# Altium PCB PCB1.PcbDoc
Units mm, origin at the board's own origin, x right, y up, seen from the top; angles counter-clockwise.
Board outline 46.58 x 46.58 mm, 2 copper layers (Top Layer, Bottom Layer); 45 components, 58 nets, 168 pads, 34 vias.
Unrouted connection lines stored in the file: 11.
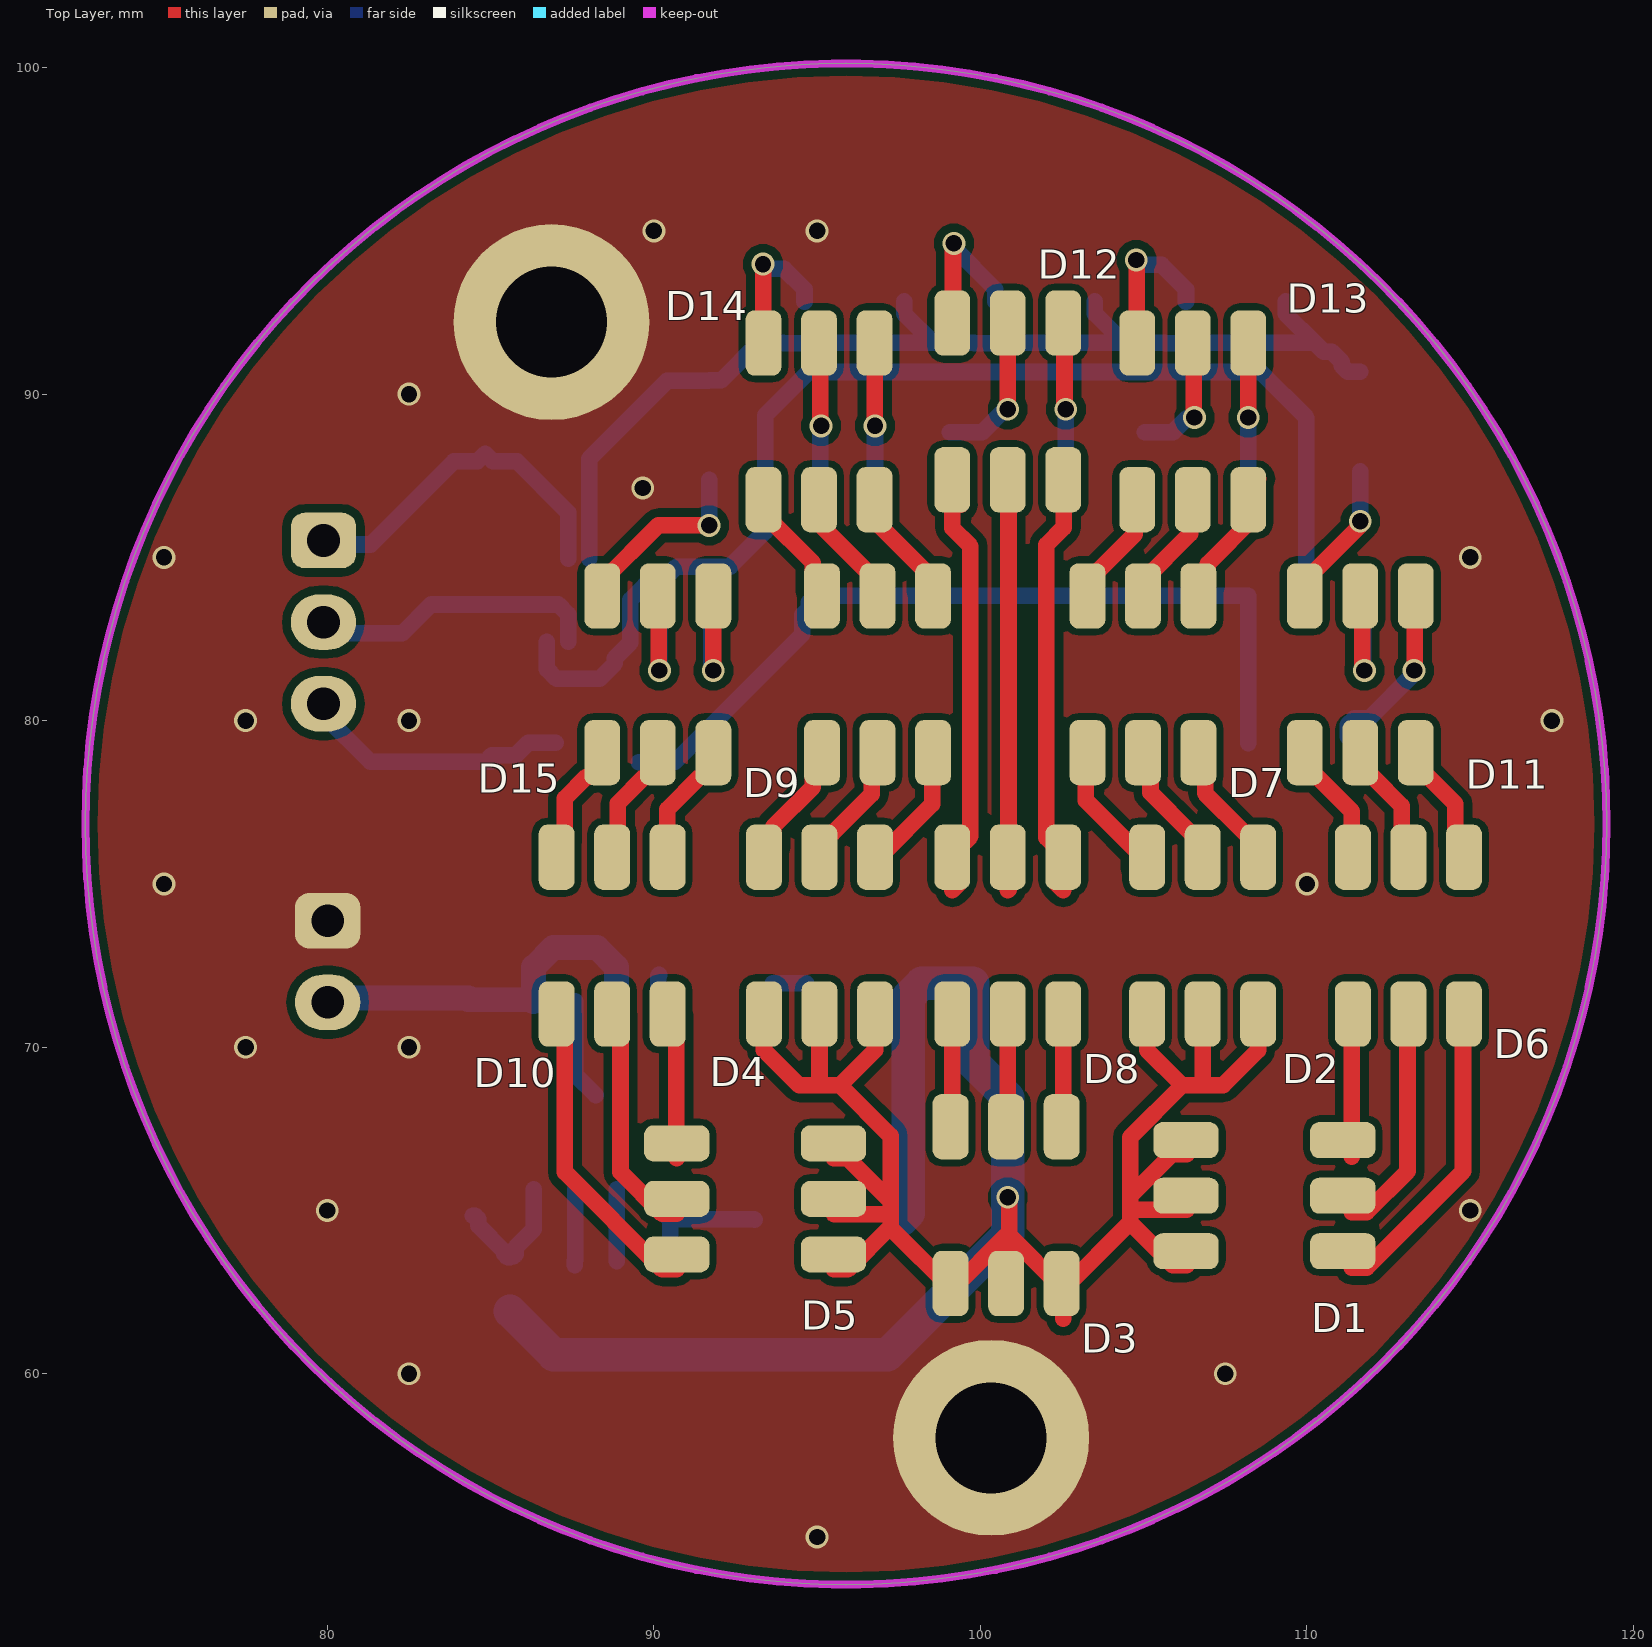
[diagram p0: Top Layer view]
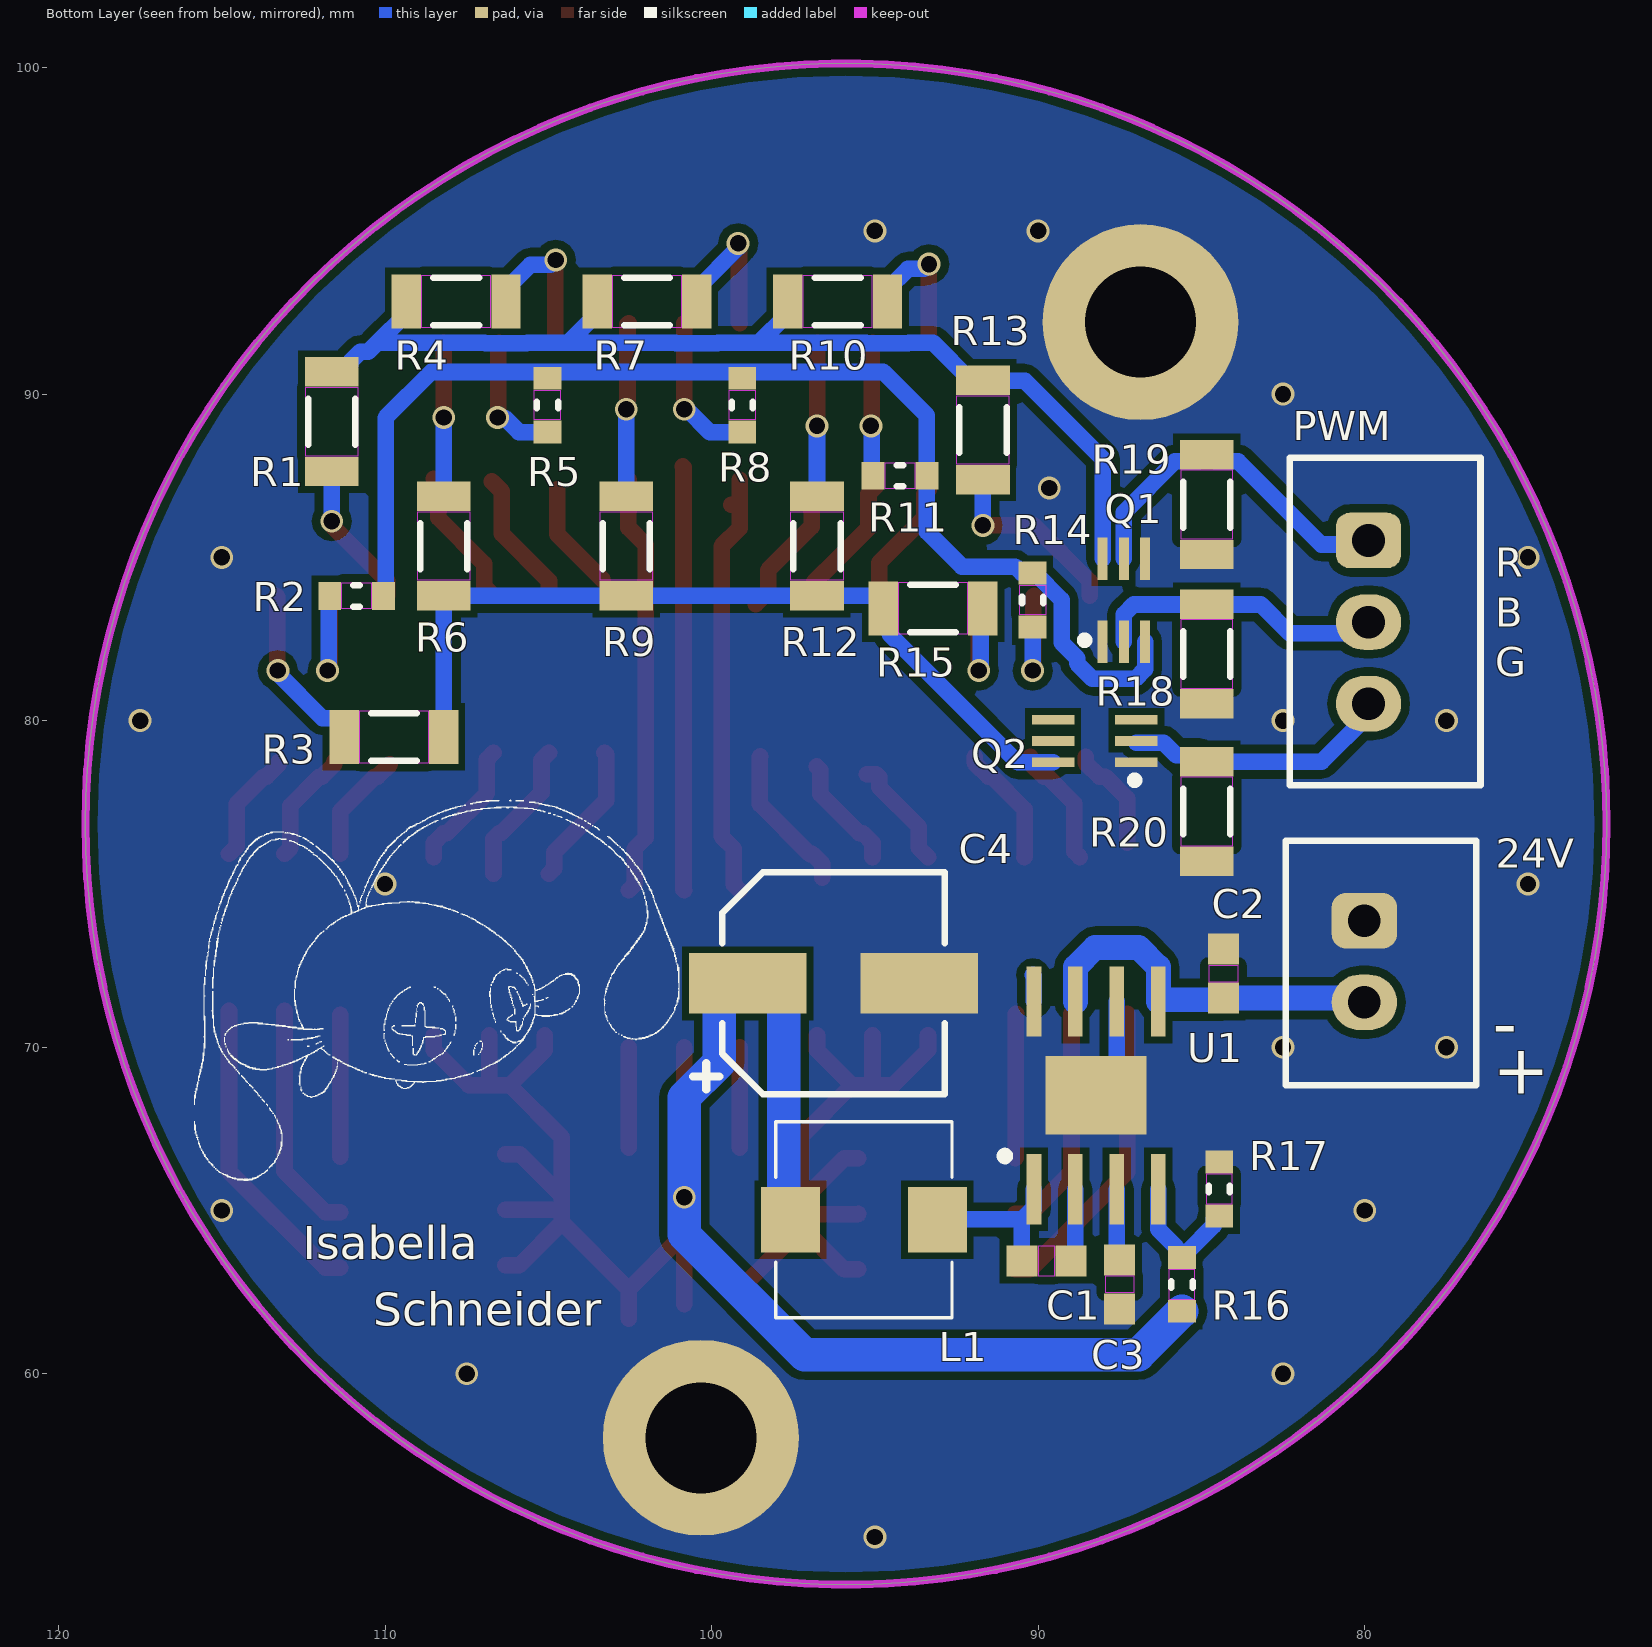
[diagram p1: Bottom Layer view, seen from below]
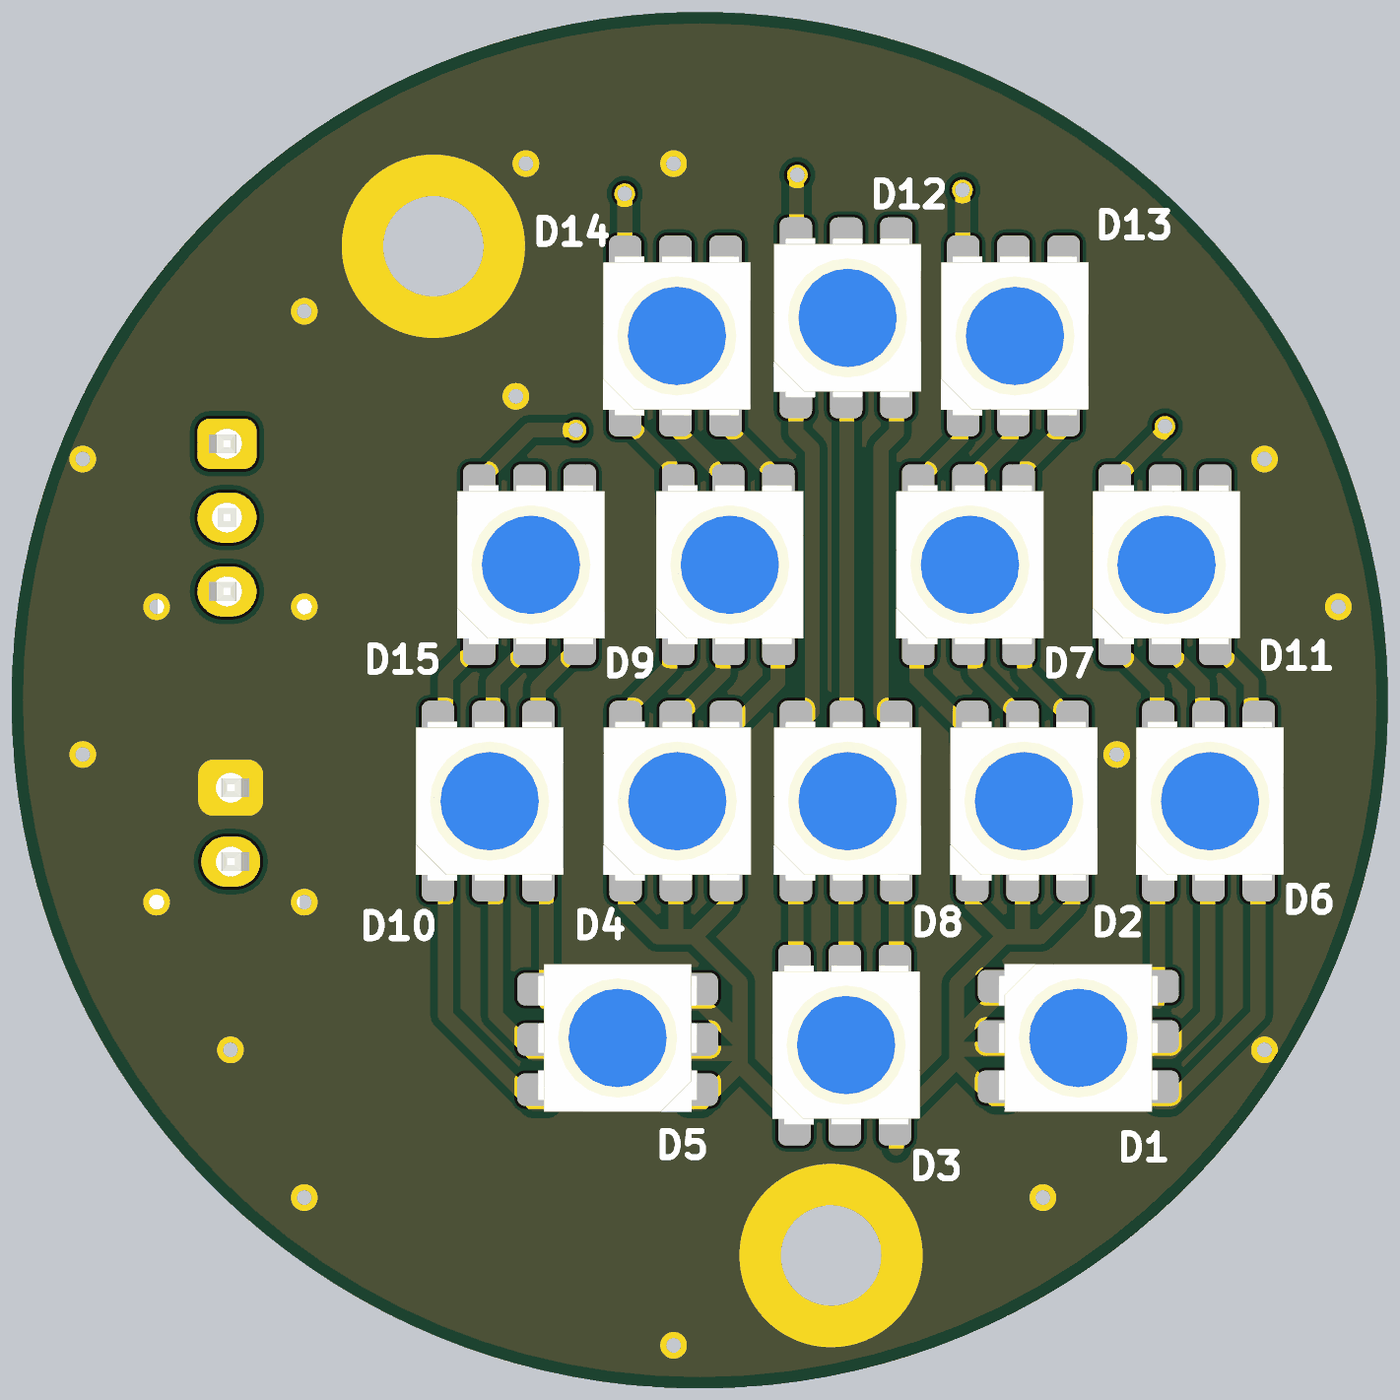
[diagram p2: 3D render of the assembled board from above, using the file's embedded part models]
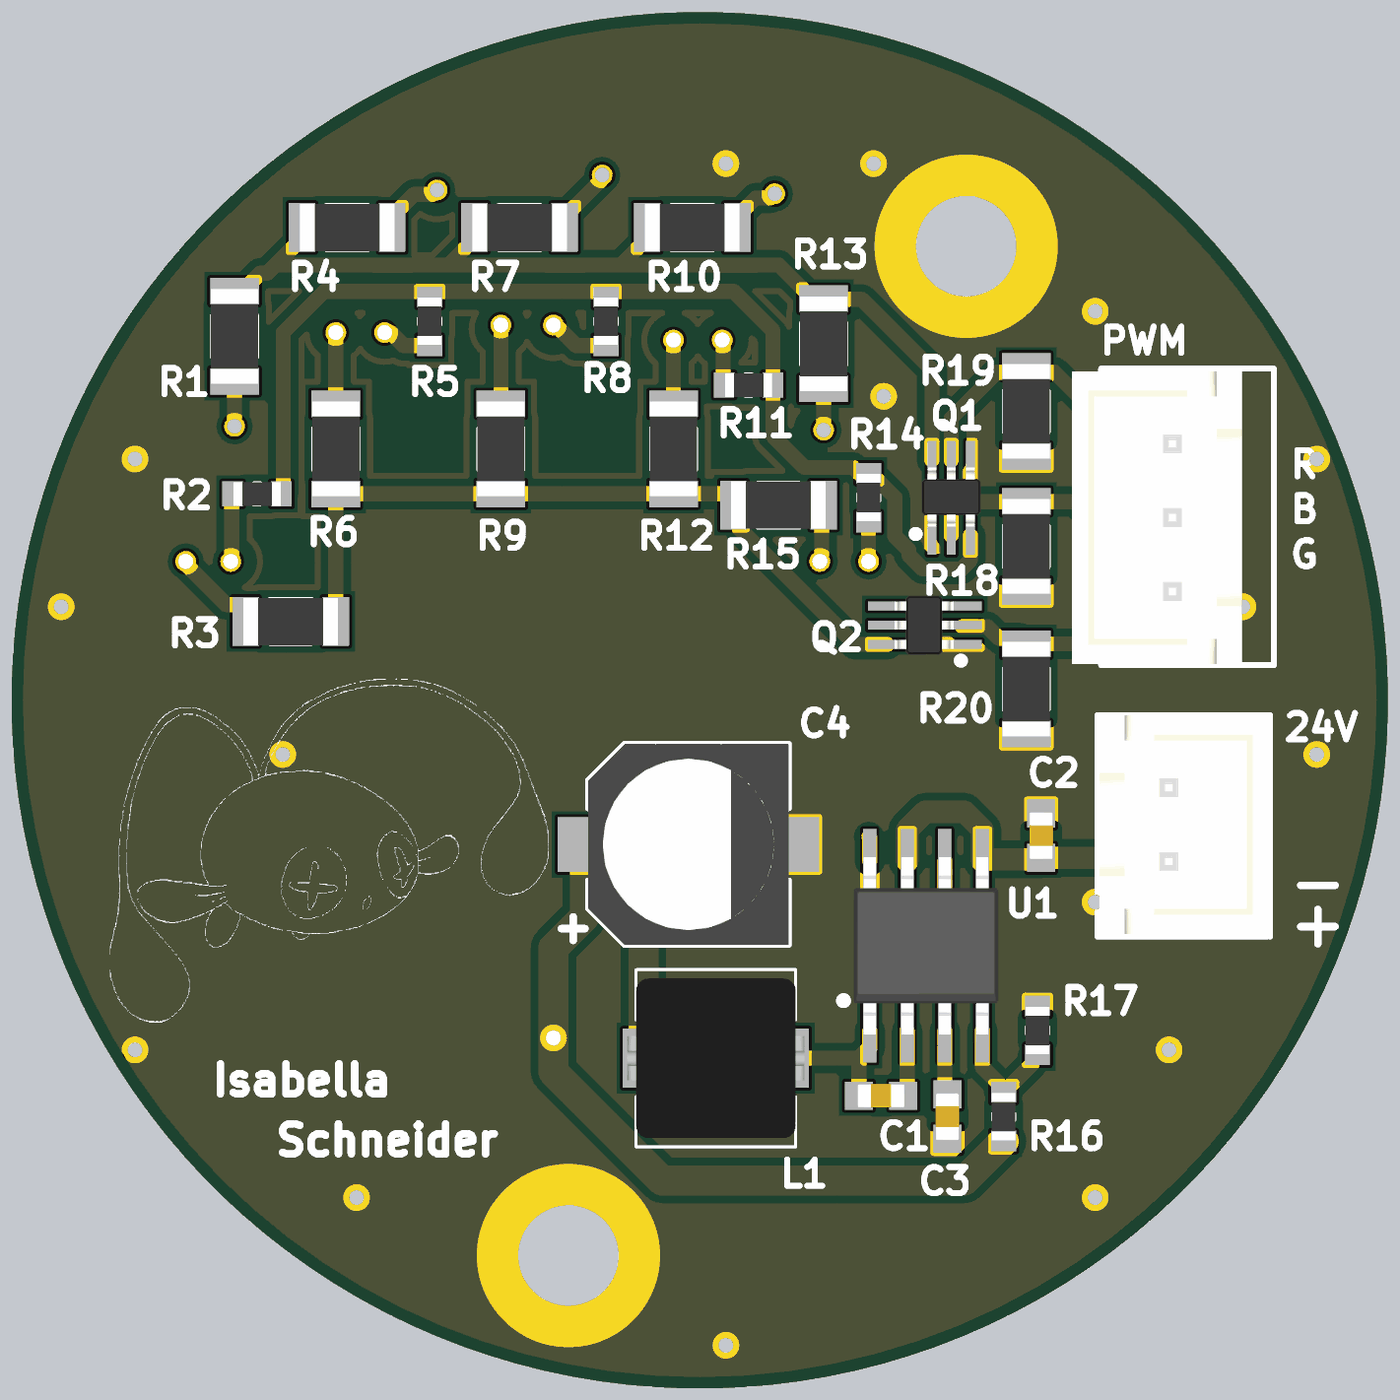
[diagram p3: 3D render of the assembled board from below, using the file's embedded part models]

## Layer stack, top to bottom
Top Solder: solder mask 0.0102, Solder Resist, Dk 3.5
Top Layer: signal copper 0.0356
Dielectric 1: dielectric 0.32, FR-4, Dk 4.8
Bottom Layer: signal copper 0.0356
Bottom Solder: solder mask 0.0102, Solder Resist, Dk 3.5

## Board outline
72.593,76.835 ccw(c95.885,76.835) 95.885,53.543 ccw(c95.885,76.835) 119.177,76.835 ccw(c95.885,76.835) 95.885,100.127 ccw(c95.885,76.835)

## Design rules (kind name [scope] priority, off if disabled: settings)
Clearance [All] p1: gap=0.254 ignorepadtopadclearanceinfootprint=FALSE except(0: Arc-Hole Track-Hole SMDPad-Hole THPad-Hole Via-Hole Fill-Hole Poly-Hole Region-Hole Text-Hole; 0.127: Arc-Arc Arc-Track Track-Track SMDPad-SMDPad; 0.2: Arc-SMDPad Track-SMDPad SMDPad-Fill SMDPad-Poly SMDPad-Region)
MinimumSolderMaskSliver [All] p1: minsoldermaskwidth=0.229
PolygonConnect PolygonConnect_3 [All vs IsNamedPolygon('GND_L02_P005')] p1: connectstyle=Direct reliefconductorwidth=0.254 reliefentries=4 polygonreliefangle="90 Angle" airgapwidth=0.254
PolygonConnect PolygonConnect_2 [All vs IsNamedPolygon('GND_L01_P007')] p2: connectstyle=Direct reliefconductorwidth=0.254 reliefentries=4 polygonreliefangle="90 Angle" airgapwidth=0.254
PolygonConnect PolygonConnect_1 [All vs IsNamedPolygon('GND_L01_P007')] p3: thpad.connectstyle=Relief thpad.reliefconductorwidth=0.254 thpad.reliefentries=4 thpad.polygonreliefangle="90 Angle" thpad.airgapwidth=0.254 smdpad.connectstyle=Direct smdpad.reliefconductorwidth=0.254 smdpad.reliefentries=4 smdpad.polygonreliefangle="90 Angle" smdpad.airgapwidth=0.254 via.connectstyle=Relief via.reliefconductorwidth=0.254 via.reliefentries=4 via.polygonreliefangle="90 Angle" via.airgapwidth=0.254
PolygonConnect [All] p4: connectstyle=Relief reliefconductorwidth=0.254 reliefentries=4 polygonreliefangle="90 Angle" airgapwidth=0.254
RoutingVias [All] p1: holewidth=0.5 width=1 viastyle="Through Hole" minholewidth=0.2 minwidth=0.6 maxholewidth=0.711 maxwidth=1.27
SilkToSolderMaskClearance [IsPad] p1: minsilkscreentomaskgap=0.15 clearancetoexposedcopper=TRUE
SolderMaskExpansion [All] p1: expansion=0.102 istentingtop=FALSE
Width [All] p1: maxlimit=1.016 minlimit=0.254 preferedwidth=0.381 toplayer_prefwidth=0.254 minimp=50.000000 maximp=50.000000 favimp=50.000000
28 further rules are at their usual default settings.

## Components (designator, comment, footprint, x,y, rotation, side; value= is the part's Value field where it differs from the comment)
24V "1x2 Header" B2B-XH 80.01,71.374 r90 bottom (schematic designator P1)
C1 "Capacitor - Nonpolarized" "0603 - Capacitor" 89.749,63.446 r180 bottom value=100nF
C2 "Capacitor - Nonpolarized" "0603 - Capacitor" 84.328,72.251 r270 bottom value=10uF
C3 "Capacitor - Nonpolarized" "0603 - Capacitor" 87.503,62.738 r90 bottom value=2.2uF
C4 "Capacitor - Polarized" "OCVZ0606 - CAPACITOR" 96.268,71.955 r180 bottom value=27uF
D1 "RGB LED- Indiv" RGB-6 106.299,63.754 r0 top
D2 "RGB LED- Indiv" RGB-6 108.507,71.019 r90 top
D3 "RGB LED- Indiv" RGB-6 102.489,62.764 r90 top
D4 "RGB LED- Indiv" RGB-6 96.774,71.019 r90 top
D5 "RGB LED- Indiv" RGB-6 95.504,67.054 r180 top
D6 "RGB LED- Indiv" RGB-6 114.808,71.019 r90 top
D7 "RGB LED- Indiv" RGB-6 106.68,79.02 r90 top
D8 "RGB LED- Indiv" RGB-6 102.538,71.019 r90 top
D9 "RGB LED- Indiv" RGB-6 98.552,79.02 r90 top
D10 "RGB LED- Indiv" RGB-6 90.424,71.019 r90 top
D11 "RGB LED- Indiv" RGB-6 113.333,79.02 r90 top
D12 "RGB LED- Indiv" RGB-6 108.204,86.767 r90 top
D13 "RGB LED- Indiv" RGB-6 102.538,87.376 r90 top
D14 "RGB LED- Indiv" RGB-6 96.76,86.767 r90 top
D15 "RGB LED- Indiv" RGB-6 91.821,79.02 r90 top
L1 "Inductor" "PA4340 - Inductor" 95.337,64.716 r0 bottom value=4.7uH
PWM "1x3 Header" B3B-XH 79.883,85.518 r270 bottom (schematic designator P2)
Q1 "BSD235NH6327XTSA1" BSD235NH6327XTSA1 88.026,84.963 r180 bottom
Q2 "BSD235NH6327XTSA1" BSD235NH6327XTSA1 89.545,78.725 r90 bottom
R1 "Resistor" "1206 - Resistor" 111.633,89.154 r270 bottom value=160
R2 "Resistor" "0603 - Resistor" 110.871,83.82 r0 bottom value=60
R3 "Resistor" "1206 - Resistor" 109.728,79.502 r0 bottom value=160
R4 "Resistor" "1206 - Resistor" 107.823,92.837 r180 bottom value=160
R5 "Resistor" "0603 - Resistor" 105.029,89.662 r270 bottom value=60
R6 "Resistor" "1206 - Resistor" 108.204,85.344 r90 bottom value=160
R7 "Resistor" "1206 - Resistor" 101.981,92.837 r180 bottom value=160
R8 "Resistor" "0603 - Resistor" 99.06,89.662 r270 bottom value=60
R9 "Resistor" "1206 - Resistor" 102.616,85.344 r90 bottom value=160
R10 "Resistor" "1206 - Resistor" 96.139,92.837 r180 bottom value=160
R11 "Resistor" "0603 - Resistor" 94.234,87.503 r0 bottom value=60
R12 "Resistor" "1206 - Resistor" 96.774,85.344 r90 bottom value=160
R13 "Resistor" "1206 - Resistor" 91.694,88.9 r270 bottom value=160
R14 "Resistor" "0603 - Resistor" 90.17,83.693 r270 bottom value=60
R15 "Resistor" "1206 - Resistor" 93.218,83.439 r180 bottom value=160
R16 "Resistor" "0603 - Resistor" 85.598,62.738 r270 bottom value=243K
R17 "Resistor" "0603 - Resistor" 84.455,65.659 r270 bottom value=22.1K
R18 "Resistor" "1206 - Resistor" 84.836,82.042 r90 bottom value=1k
R19 "Resistor" "1206 - Resistor" 84.836,86.614 r90 bottom value=1k
R20 "Resistor" "1206 - Resistor" 84.836,77.216 r90 bottom value=1k
U1 "LMR23625CDDAR" LMR23625CDDAR 90.13,65.651 r180 bottom

## Footprints (in the part's own frame and the unit in brackets; to place one, negate y for a bottom-side part, rotate by r counter-clockwise, add the part's x,y. Pads: shape width x height; smd on the part's side, far side on the other; paste and mask are expansions set on the pad)
"0603 - Capacitor" [mm] "0603 Chip Capacitor - IPC Medium Density"
  rect 0.95x0.95 smd: 1(-0.75,0) 2(0.75,0)
  Top Layer keep-out region: -0.25,0.45 -0.25,-0.45 0.25,-0.45 0.25,0.45
  body extent -0.8,-0.4 0.8,0.4, height 0.8
"0603 - Resistor" [mm] "0603 Chip Resistor - IPC Medium Density"
  rect 0.7x0.85 smd: 1(-0.825,0) 2(0.825,0)
  Top Layer keep-out region: -0.45,-0.4 -0.45,0.4 0.45,0.4 0.45,-0.4
  silkscreen extent -0.1,-0.33 0.1,0.33, body extent -0.8,-0.4 0.8,0.4, height 0.45
"1206 - Resistor" [mm] "1206 Chip Resistor - IPC Medium Density"
  rect 0.9x1.65 smd: 1(-1.525,0) 2(1.525,0)
  Top Layer keep-out region: -1.05,-0.8 -1.05,0.8 1.05,0.8 1.05,-0.8
  silkscreen extent -0.7,-0.72 0.7,0.72, body extent -1.6,-0.8 1.6,0.8, height 0.55
B2B-XH [mm] "JST 2-pin Header"
  oval 1.7x2 hole 1: 1(0,0)
  rrect50% 1.7x2 hole 1: 2(2.5,0)
  silkscreen extent -2.54,-3.43 4.95,2.41, body extent -2.45,-3.4 4.95,2.35, height 7
B3B-XH [mm] "JST 3-pin connector"
  rrect50% 1.7x2 hole 1: 1(0,0)
  oval 1.7x2 hole 1: 2(2.5,0) 3(5,0)
  silkscreen extent -2.54,-2.41 7.49,3.43, body extent -2.45,-3.4 7.45,2.35, height 7
BSD235NH6327XTSA1 [mm] "SOT-363"
  rect 0.3x1.3 smd: 1(0,-2.55) 2(0.65,-2.55) 3(1.3,-2.55) 4(1.3,0) 5(0.65,0) 6(0,0)
  silkscreen extent -0.66,-2.61 -0.44,-2.39, body extent -0.35,-2.25 1.65,-0.25, height 1.05
LMR23625CDDAR [mm] "8-SO POWERPAD"
  rect 0.45x2.15 smd: 1(0,0) 2(1.27,0) 3(2.54,0) 4(3.81,0) 5(3.81,5.75) 6(2.54,5.75) 7(1.27,5.75) 8(0,5.75)
  rect 3.1x2.4 smd: 9(1.905,2.875)
  silkscreen extent -1.02,0.89 -0.76,1.14, body extent -0.54,-0.12 4.36,5.88, height 1.57
"OCVZ0606 - CAPACITOR" [mm] "Aluminum Electrolytic Capacitor, Body 6.60x6.60x6.00mm, IPC Low Density"
  rect 3.6x1.85 smd: 1(-2.625,0) 2(2.625,0)
  silkscreen extent -4.3,-3.4 3.4,3.4, body extent -3.6,-3.4 3.6,3.4, height 6
"PA4340 - Inductor" [mm]
  rect 1.8x2 smd: 1(-2.25,0) 2(2.25,0)
  silkscreen extent -2.7,-3 2.7,3, body extent -3,-2.7 3,2.7, height 2.7
RGB-6 [mm] "6 Pin RGB"
  rrect50% 2x1.1 smd: 1(0,0) 2(0,1.7) 3(0,3.4) 4(4.8,3.4) 5(4.8,1.7) 6(4.8,0)
  body extent -0.3,-0.85 5.1,4.15, height 1.85

## Part data
24V: "1x2 Pin Header"
C1 C2 C3: "Nonpolarized Capacitor"
C4: "Polarized Capacitor"
D1 D2 D3 D4 D5 D6 D7 D8 D9 D10 D11 D12 D13 D14 D15: "6-pin RGB LED"
PWM: "1x3 Pin Header"
U1: "36V 2.5A Buck Converter", Manufacturer=TI, Supplier Part Number=296-47268-1-ND, ComponentLink1Description=Datasheet, ComponentLink1URL=https://www.ti.com/lit/ds/symlink/lmr23625.pdf?HQS=dis-dk-null-digikeymode-dsf-pf-null-wwe&ts=1623367278580, Manufacturer Part Number=LMR23625CDDAR, Supplier=Digikey

## Free pads (board coordinates)
  round 6 hole 3.4: 2(86.868,92.202) 3(100.33,58.039)

## Via types
v1: diameter 0.7, hole 0.5, Top Layer to Bottom Layer, 34 vias

## Nets (pads, with @x,y where several pads share a name; then routed paths per layer and width w, separated by ;. In a path a pad name is that pad's centre, name@x,y a point inside that pad or via, vN(x,y) a via of type N, cw(c..) or ccw(c..) an arc to the next point about the centre after c; other vN are vias at no path point)
+12: C4.1 D1.1 D1.2 D1.3 D2.1 D2.2 D2.3 D3.1 D3.2 D3.3 D4.1 D4.2 D4.3 D5.1 D5.2 D5.3 L1.2 R16.2 | length 84.9
  Top Layer w0.508: D4.3@93.374,70.358 93.374,69.908 94.448,68.834 95.074,68.834 ; D4.2@95.074,70.358 95.074,68.834 ; D5.3@95.504,63.197 95.943,63.197 97.231,64.486 ; D5.2@95.504,64.897 95.523,64.878 97.25,64.878 ; D5.1@95.504,66.597 95.943,66.597 97.25,65.289 ; D4.1@96.774,70.358 96.774,69.908 95.7,68.834 ; 100.789,64.23 99.138,62.579 97.25,64.467 97.25,64.878 ; D3.2@100.838,62.129 100.838,64.23 ; v1(100.838,65.405) 100.887,65.356 100.887,64.23 D3.1@102.538,62.579 ; 102.538,61.679 102.538,62.129 D3.1@102.538,62.579 ; D2.3@105.107,70.358 105.107,69.908 106.181,68.834 ; D1.1@106.325,63.324 105.886,63.324 104.585,64.626 ; D1.2@106.325,65.024 104.585,65.024 ; D1.3@106.325,66.724 105.875,66.724 104.585,65.434 ; D2.2@106.807,70.358 106.807,68.834 ; D2.1@108.507,70.358 108.507,69.908 107.433,68.834 106.807,68.834 ; 95.074,68.834 95.7,68.834 ; 95.7,68.834 97.25,67.284 97.25,65.289 ; 97.25,64.878 97.25,65.289 ; D3.1@102.538,62.579 104.585,64.626 ; 104.585,64.626 104.585,65.024 ; 104.585,65.024 104.585,65.434 ; 104.585,65.434 104.585,67.238 106.181,68.834 ; 106.181,68.834 106.807,68.834
  Bottom Layer w1.016: R16.2 86.932,60.579 97.155,60.579 100.838,64.262 v1(100.838,65.405) ; L1.2 97.79,64.919 97.79,71.538 98.207,71.955 99.768,71.955 99.768,69.532 100.838,68.462 v1@100.838,65.361
BLUE: PWM.2 Q1.2 R18.2 | length 8.8
  Bottom Layer w0.508: PWM.2@79.883,82.677 82.301,82.677 83.18,83.556 84.836,83.556 87.078,83.556 87.376,83.258 Q1.2
GND: 24V.2 C2.1 C3.1 C4.2 pad.2 pad.3 Q1.1 Q1.4 Q2.1 R17.1 R18.1 R19.1 R20.1 U1.6 U1.8 U1.9 | length 5
  Bottom Layer w0.508: U1.6 87.59,69.161 U1.9 ; U1.8 90.13,72.18 U1.8@90.159,72.209 ; C4.2 C4.2@94.659,71.955
  other v1: 95,55 82.5,60 107.5,60 80,65 115,65 77.5,70 82.5,70 75,75 110,75 77.5,80 82.5,80 117.5,80 75,85 115,85 89.662,87.122 82.5,90 90,95 95,95
GREEN: PWM.3 Q2.2 R20.2 | length 8.2
  Bottom Layer w0.508: PWM.3@79.883,80.177 81.319,78.741 R20.2 ; R20.2@85.055,78.741 R20.2 ; Q2.2@86.995,79.329 86.157,79.329 85.765,78.937 85.032,78.937 R20.2
NetC1_1: C1.1 L1.1 U1.1 | length 5
  Bottom Layer w0.508: U1.1 90.13,65.052 90.159,65.023 90.201,65.023 90.499,64.725 ; C1.1 90.499,64.725 ; L1.1 93.078,64.725 90.499,64.725
NetC1_2: C1.2 U1.2 | length 2.2
  Bottom Layer w0.508: C1.2@88.866,63.452 U1.2@88.866,65.651
NetC3_2: C3.2 U1.3 | length 2.3
  Bottom Layer w0.508: C3.2@87.578,63.319 87.578,63.458 87.59,63.47 U1.3
NetD1_4: D1.4 D6.3 | length 4.3
  Top Layer w0.508: D1.4@111.379,66.646 D6.3@111.379,70.993
NetD1_5: D1.5 D6.2 | length 7.1
  Top Layer w0.508: D1.5@111.379,64.946 111.829,64.946 113.079,66.196 D6.2@113.079,71.12
NetD1_6: D1.6 D6.1 | length 9.5
  Top Layer w0.508: D1.6@111.379,63.246 111.829,63.246 114.779,66.196 D6.1@114.779,71.12
NetD2_4: D2.4 D7.3 | length 4.5
  Top Layer w0.508: D7.3 103.23,78.97 103.23,77.556 104.824,75.961 104.824,75.467 D2.4@104.98,75.311
NetD2_5: D2.5 D7.2 | length 4.4
  Top Layer w0.508: D7.2 105.209,78.791 105.209,77.798 106.455,76.552 106.513,76.552 106.68,76.385 D2.5@106.68,75.311
NetD2_6: D2.6 D7.1 | length 4
  Top Layer w0.508: D7.1 106.884,78.816 106.884,77.774 108.106,76.552 108.213,76.552 108.507,76.258 D2.6
NetD3_4: D3.4 D8.3 | length 3.1
  Top Layer w0.508: D3.4@99.138,66.929 99.138,70.003
NetD3_5: D3.5 D8.2 | length 3.1
  Top Layer w0.508: D3.5@100.838,66.929 100.838,70.003
NetD3_6: D3.6 D8.1 | length 3.1
  Top Layer w0.508: D3.6@102.538,66.929 102.538,70.003
NetD4_4: D4.4 D9.3 | length 3.5
  Top Layer w0.508: D4.4 93.657,76.102 93.657,76.756 94.869,77.968 94.869,78.276 94.952,78.359 D9.3@95.25,78.359
NetD4_5: D4.5 D9.2 | length 3.5
  Top Layer w0.508: D4.5 95.074,76.258 95.368,76.552 95.475,76.552 96.672,77.749 96.672,78.488 D9.2@96.779,78.595
NetD4_6: D4.6 D9.1 | length 4.6
  Top Layer w0.508: D4.6@96.618,75.184 96.618,75.623 96.912,75.917 96.999,75.917 98.525,77.443 98.525,78.891 D9.1@98.508,78.908
NetD5_4: D5.4 D10.3 | length 9.5
  Top Layer w0.508: D10.3@87.278,71.019 87.278,66.173 90.254,63.197 D5.4@90.704,63.197
NetD5_5: D5.5 D10.2 | length 7.1
  Top Layer w0.508: D10.2@88.978,71.019 88.978,66.173 90.254,64.897 D5.5@90.704,64.897
NetD5_6: D5.6 D10.1 | length 4.4
  Top Layer w0.508: D10.1@90.678,71.019 90.691,71.006 90.691,66.61 D5.6@90.704,66.597
NetD6_4: D6.4 D11.3 | length 3.4
  Top Layer w0.508: D11.3@109.855,78.659 110.227,78.287 110.308,78.287 111.367,77.228 111.367,75.932 D6.4@111.379,75.92
NetD6_5: D6.5 D11.2 | length 3.5
  Top Layer w0.508: D11.2@111.555,78.74 111.555,78.659 111.927,78.287 112.008,78.287 112.901,77.394 112.901,76.098 D6.5@113.079,75.92
NetD6_6: D6.6 D11.1 | length 3.5
  Top Layer w0.508: D11.1@113.255,78.74 113.255,78.659 113.627,78.287 113.708,78.287 114.547,77.448 114.547,76.152 D6.6@114.779,75.92
NetD7_4: D7.4 D12.3 | length 3.3
  Top Layer w0.508: D7.4@103.358,84.337 104.734,85.713 D12.3@104.734,87.078
NetD7_5: D7.5 D12.2 | length 4.2
  Top Layer w0.508: D7.5 104.98,84.279 106.424,85.723 106.424,87.019 D12.2@106.73,87.325
NetD7_6: D7.6 D12.1 | length 4.3
  Top Layer w0.508: D7.6 106.963,84.103 106.963,84.802 108.373,86.212 108.373,87.268 D12.1@108.507,87.402
NetD8_4: D8.4 D13.3 | length 13.3
  Top Layer w0.508: 99.138,74.803 99.316,74.981 99.316,76.075 99.695,76.454 99.695,85.344 99.138,85.901 D13.3@99.138,86.608 ; D13.3 D13.3@99.138,86.608 ; D13.3@99.4,86.608 D13.3@99.138,86.608
NetD8_5: D8.5 D13.2 | length 13
  Top Layer w0.508: 100.838,74.803 100.863,74.828 100.863,87.758 D13.2@100.887,87.783
NetD8_6: D8.6 D13.1 | length 13
  Top Layer w0.508: 102.538,74.803 102.36,74.981 102.36,76.075 102.022,76.413 102.022,85.385 102.55,85.913 102.55,87.364 D13.1
NetD9_4: D9.4 D14.3 | length 3.9
  Top Layer w0.508: D14.3@93.345,87.079 93.486,86.938 93.486,86.219 94.869,84.836 94.869,83.947 D9.4@94.967,83.849
NetD9_5: D9.5 D14.2 | length 4.1
  Top Layer w0.508: D14.2@94.996,87.148 95.196,86.948 95.196,85.897 96.54,84.553 96.558,84.553 96.852,84.259 D9.5
NetD9_6: D9.6 D14.1 | length 4.4
  Top Layer w0.508: D14.1@96.696,87.148 96.939,86.905 96.939,85.941 98.269,84.611 98.269,83.947 D9.6@98.65,83.566
NetD10_4: D10.4 D15.3 | length 3.3
  Top Layer w0.508: D10.4@87.278,76.258 87.278,77.623 87.942,78.287 88.127,78.287 88.548,78.708 D15.3@88.548,78.893
NetD10_5: D10.5 D15.2 | length 3.8
  Top Layer w0.508: D10.5 88.894,75.989 88.894,77.462 89.719,78.287 89.827,78.287 90.248,78.708 D15.2@90.248,78.893
NetD10_6: D10.6 D15.1 | length 3.8
  Top Layer w0.508: D10.6 90.413,75.83 90.413,77.281 91.419,78.287 91.527,78.287 91.948,78.708 D15.1@91.948,78.893
NetD11_4: D11.4 R1.2 | length 4.5
  Top Layer w0.508: D11.4 109.933,84.281 111.633,85.981 v1(111.633,86.106)
  Bottom Layer w0.508: v1(111.633,86.106) R1.2
NetD11_5: D11.5 R2.2 | length 4.7
  Top Layer w0.508: D11.5 111.697,83.757 111.697,81.597 v1(111.76,81.534)
  Bottom Layer w0.508: R2.2 111.728,83.788 111.728,81.566 v1(111.76,81.534)
NetD11_6: D11.6 R3.2 | length 5.5
  Top Layer w0.508: v1(113.284,81.534) 113.308,81.558 113.308,83.795 D11.6
  Bottom Layer w0.508: R3.2 111.253,79.877 111.449,80.073 111.915,80.073 113.284,81.442 v1(113.284,81.534)
NetD12_4: D12.4 R4.2 | length 4.8
  Top Layer w0.508: v1(104.775,94.107) 104.79,94.092 104.79,91.582 D12.4
  Bottom Layer w0.508: v1(104.775,94.107) 104.921,93.961 105.549,93.961 106.298,93.212 R4.2
NetD12_5: D12.5 R5.2 | length 4
  Top Layer w0.508: D12.5 106.529,91.543 106.529,89.305 v1(106.553,89.281)
  Bottom Layer w0.508: R5.2 105.903,88.837 106.347,89.281 v1(106.553,89.281)
NetD12_6: D12.6 R6.2 | length 4.7
  Top Layer w0.508: v1(108.204,89.281) D12.6
  Bottom Layer w0.508: R6.2 v1(108.204,89.281)
NetD13_4: D13.4 R7.2 | length 4.8
  Top Layer w0.508: D13.4 99.162,92.201 99.162,94.59 v1(99.187,94.615)
  Bottom Layer w0.508: v1(99.187,94.615) 99.187,94.481 100.456,93.212 R7.2
NetD13_5: D13.5 R8.2 | length 4.7
  Top Layer w0.508: v1(100.838,89.535) D13.5
  Bottom Layer w0.508: R8.2 100.061,88.837 100.759,89.535 v1(100.838,89.535)
NetD13_6: D13.6 R9.2 | length 5.3
  Top Layer w0.508: D13.6 102.577,92.137 102.577,89.574 v1(102.616,89.535)
  Bottom Layer w0.508: R9.2 v1(102.616,89.535)
NetD14_4: D14.4 R10.2 | length 4.4
  Top Layer w0.508: v1(93.345,93.98) 93.353,93.972 93.353,91.574 D14.4
  Bottom Layer w0.508: v1(93.345,93.98) 93.491,93.834 93.992,93.834 94.614,93.212 R10.2
NetD14_5: D14.5 R11.2 | length 4.1
  Top Layer w0.508: D14.5 95.092,91.535 95.092,89.058 v1(95.123,89.027)
  Bottom Layer w0.508: R11.2 95.091,87.535 95.091,88.995 v1(95.123,89.027)
NetD14_6: D14.6 R12.2 | length 4.7
  Top Layer w0.508: D14.6 96.767,91.56 96.767,89.034 v1(96.774,89.027)
  Bottom Layer w0.508: R12.2 v1(96.774,89.027)
NetD15_4: D15.4 R13.2 | length 5.8
  Top Layer w0.508: D15.4 88.421,84.27 90.13,85.979 v1(91.694,85.979)
  Bottom Layer w0.508: v1(91.694,85.979) R13.2
NetD15_5: D15.5 R14.2 | length 3.6
  Top Layer w0.508: D15.5 90.146,83.795 90.146,81.558 v1(90.17,81.534)
  Bottom Layer w0.508: v1(90.17,81.534) R14.2
NetD15_6: D15.6 R15.2 | length 4.2
  Top Layer w0.508: v1(91.821,81.534) D15.6
  Bottom Layer w0.508: R15.2 91.757,83.375 91.757,81.598 v1(91.821,81.534)
NetQ1_3: Q1.3 R2.1 R5.1 R8.1 R11.1 R14.1 | length 37.1
  Bottom Layer w0.508: Q1.3 86.726,81.607 86.726,81.578 87.024,81.28 88.335,81.28 88.808,81.753 88.808,81.915 89.281,82.388 89.281,83.704 90.095,84.518 90.133,84.518 R14.1 90.497,84.518 90.697,84.718 92.338,84.718 93.409,85.789 R11.1 93.409,89.345 94.742,90.678 99.06,90.678 99.529,90.678 108.585,90.678 109.982,89.281 R2.1@109.982,83.82
NetQ1_6: Q1.6 R1.1 R4.1 R7.1 R10.1 R13.1 | length 33.5
  Bottom Layer w0.508: Q1.6 88.026,88.026 90.405,90.405 91.674,90.405 R13.1 92.069,90.425 93.211,91.567 93.967,91.567 93.976,91.558 95.252,91.558 95.261,91.567 98.559,91.567 ; R10.1 97.664,92.462 98.559,91.567 ; R7.1 103.506,92.462 104.401,91.567 ; R4.1 109.348,92.462 110.243,91.567 ; R1.1 111.258,90.679 111.062,90.875 111.062,90.993 110.764,91.291 110.519,91.291 110.243,91.567 ; 98.559,91.567 99.809,91.567 99.818,91.558 101.094,91.558 101.103,91.567 104.401,91.567 ; 104.401,91.567 105.651,91.567 105.66,91.558 106.936,91.558 106.945,91.567 110.243,91.567
NetQ2_6: Q2.6 R3.1 R6.1 R9.1 R12.1 R15.1 | length 25.7
  Bottom Layer w0.508: Q2.6@89.535,78.725 90.628,78.725 94.547,82.644 94.547,83.243 R15.1 94.743,83.623 94.939,83.819 R12.1 102.362,83.819 R6.1 R3.1@108.204,79.311
NetR16_1: R16.1 R17.2 U1.4 | length 4.1
  Bottom Layer w0.508: R17.2 84.53,64.834 84.626,64.738 84.626,64.535 85.427,63.734 85.427,63.659 85.523,63.563 R16.1 ; R16.1@85.715,63.605 85.769,63.659 85.769,63.869 86.32,64.42 U1.4
RED: PWM.1 Q1.5 R19.2 | length 10.9
  Bottom Layer w0.508: PWM.1@79.883,85.177 80.099,85.393 81.329,85.393 83.879,87.943 84.601,87.943 84.836,88.178 85.071,87.943 85.808,87.943 87.376,86.375 Q1.5
VBATT: 24V.1 C2.2 U1.5 U1.7 | length 11.6
  Bottom Layer w0.762: 24V.1@80.01,71.12 80.414,71.12 80.795,71.501 C2.2 ; C2.2@84.328,71.451 86.27,71.451 U1.5 86.32,72.452 86.926,73.057 88.254,73.057 88.86,72.452 U1.7
pads on no net: Q2.3 Q2.4 Q2.5

## Polygon pours and split planes (outlines as drawn)
GND on Bottom Layer "GND_L02_P005" (solid, remove dead copper, pour order 5): 72.593,76.835 ccw(c95.885,76.835) 95.885,53.543 ccw(c95.885,76.835) 119.177,76.835 ccw(c95.885,76.835) 95.885,100.127 ccw(c95.885,76.835)
no net on Bottom Layer "NONET_L02_P006" (none, shelved, pour order 6): 72.593,76.835 ccw(c95.885,76.835) 95.885,53.543 ccw(c95.885,76.835) 119.177,76.835 ccw(c95.885,76.835) 95.885,100.127 ccw(c95.885,76.835)
GND on Top Layer "GND_L01_P007" (solid, remove dead copper, pour order 7): 72.593,76.835 ccw(c95.885,76.835) 95.885,53.543 ccw(c95.885,76.835) 119.177,76.835 ccw(c95.885,76.835) 95.885,100.127 ccw(c95.885,76.835)

## Keep-outs
Keep-Out Layer:
  circle w0.254: c95.885,76.835 r23.292

## Silkscreen, mask and mechanical layers (free items; w line width, h text height)
Bottom Overlay:
  drawing of 494 lines, arcs and shapes, not listed
  text "R" at 75.997,84.404 h0.89
  text "B" at 75.997,82.88 h0.89
  text "G" at 75.997,81.356 h0.89
  text "-" at 76.073,69.977 h1.52
  text "+" at 76.073,68.58 h1.52
  text "Isabella" at 112.522,63.5 h1.02
  text "Schneider" at 110.363,61.468 h1.02